# Altium PCB PCB1.PcbDoc
Units mm, origin at the board's own origin, x right, y up, seen from the top; angles counter-clockwise.
Board outline 115 x 90 mm, 2 copper layers (Top Layer, Bottom Layer); 70 components, 69 nets, 245 pads, 43 vias.
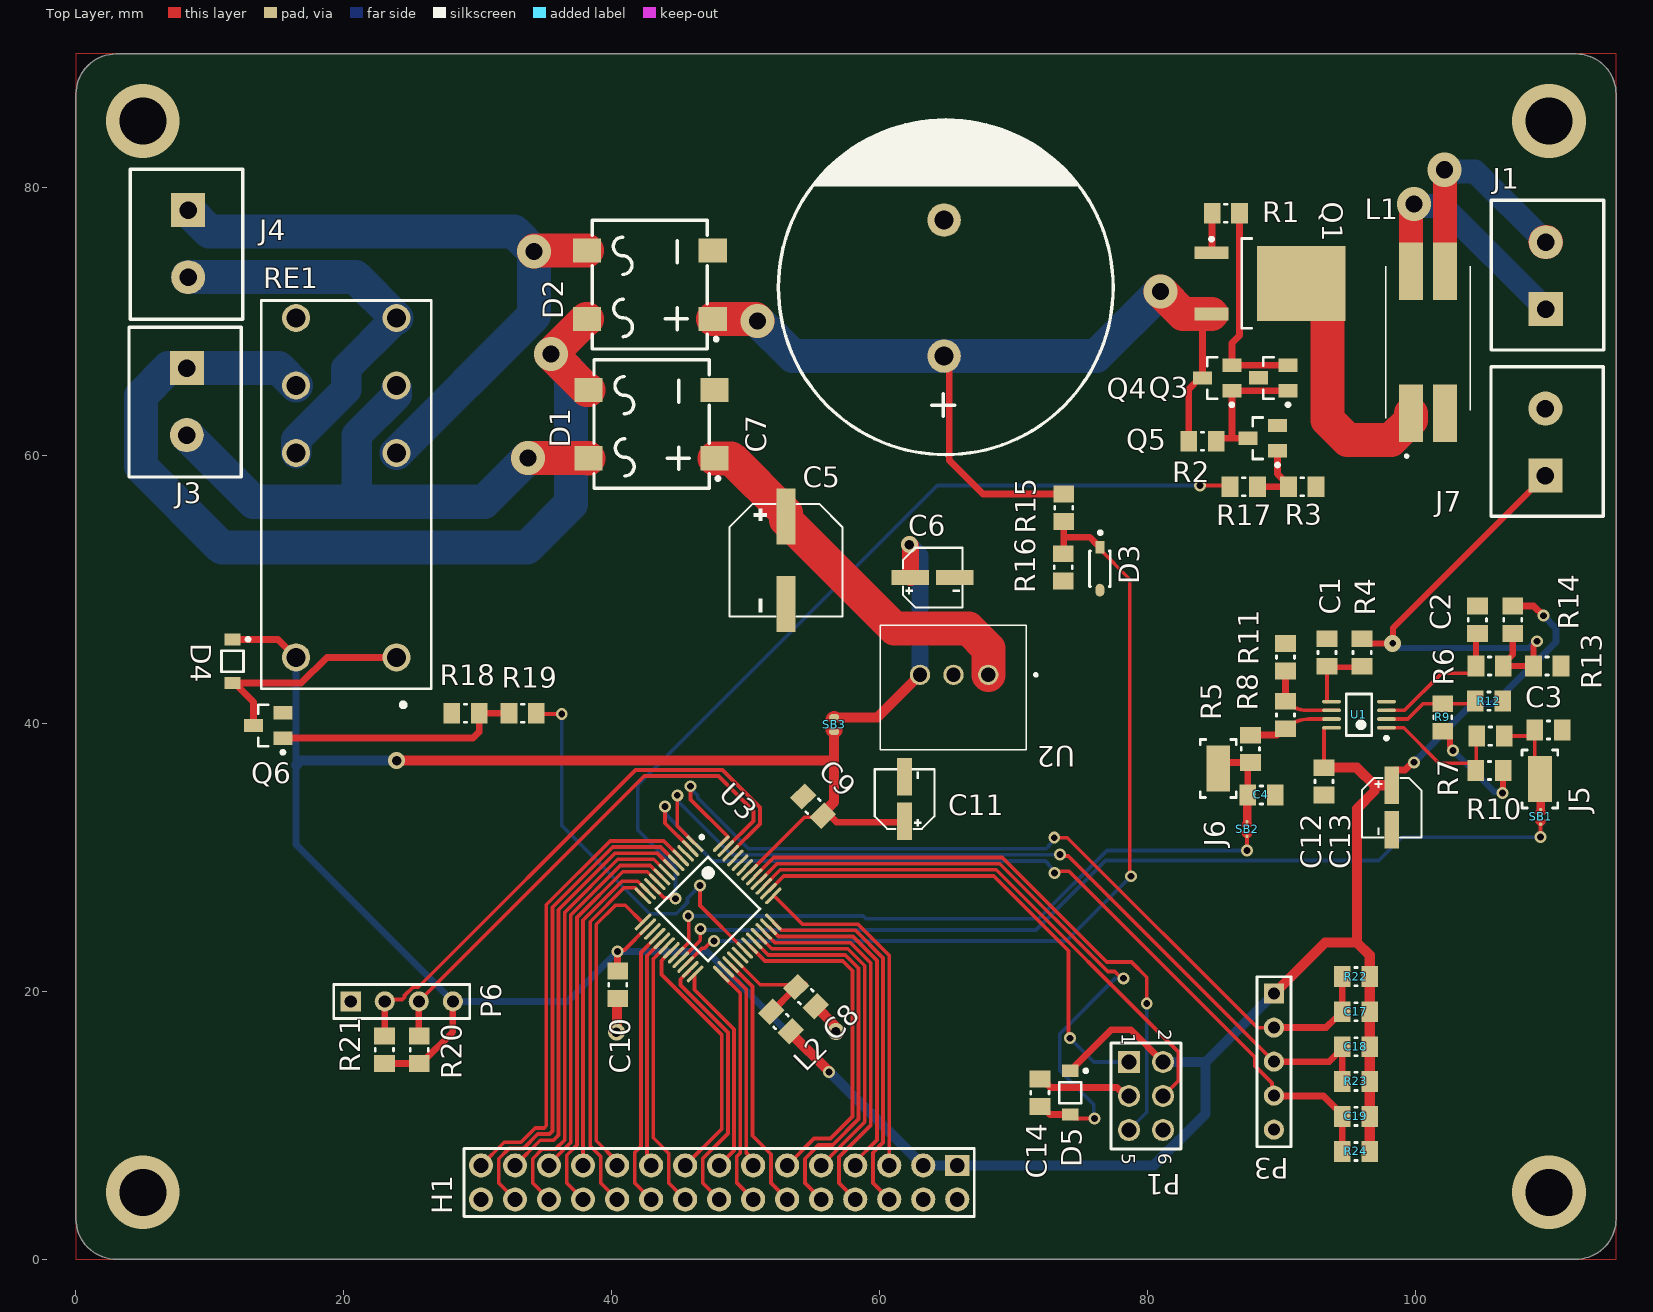
[diagram p0: Top Layer view]
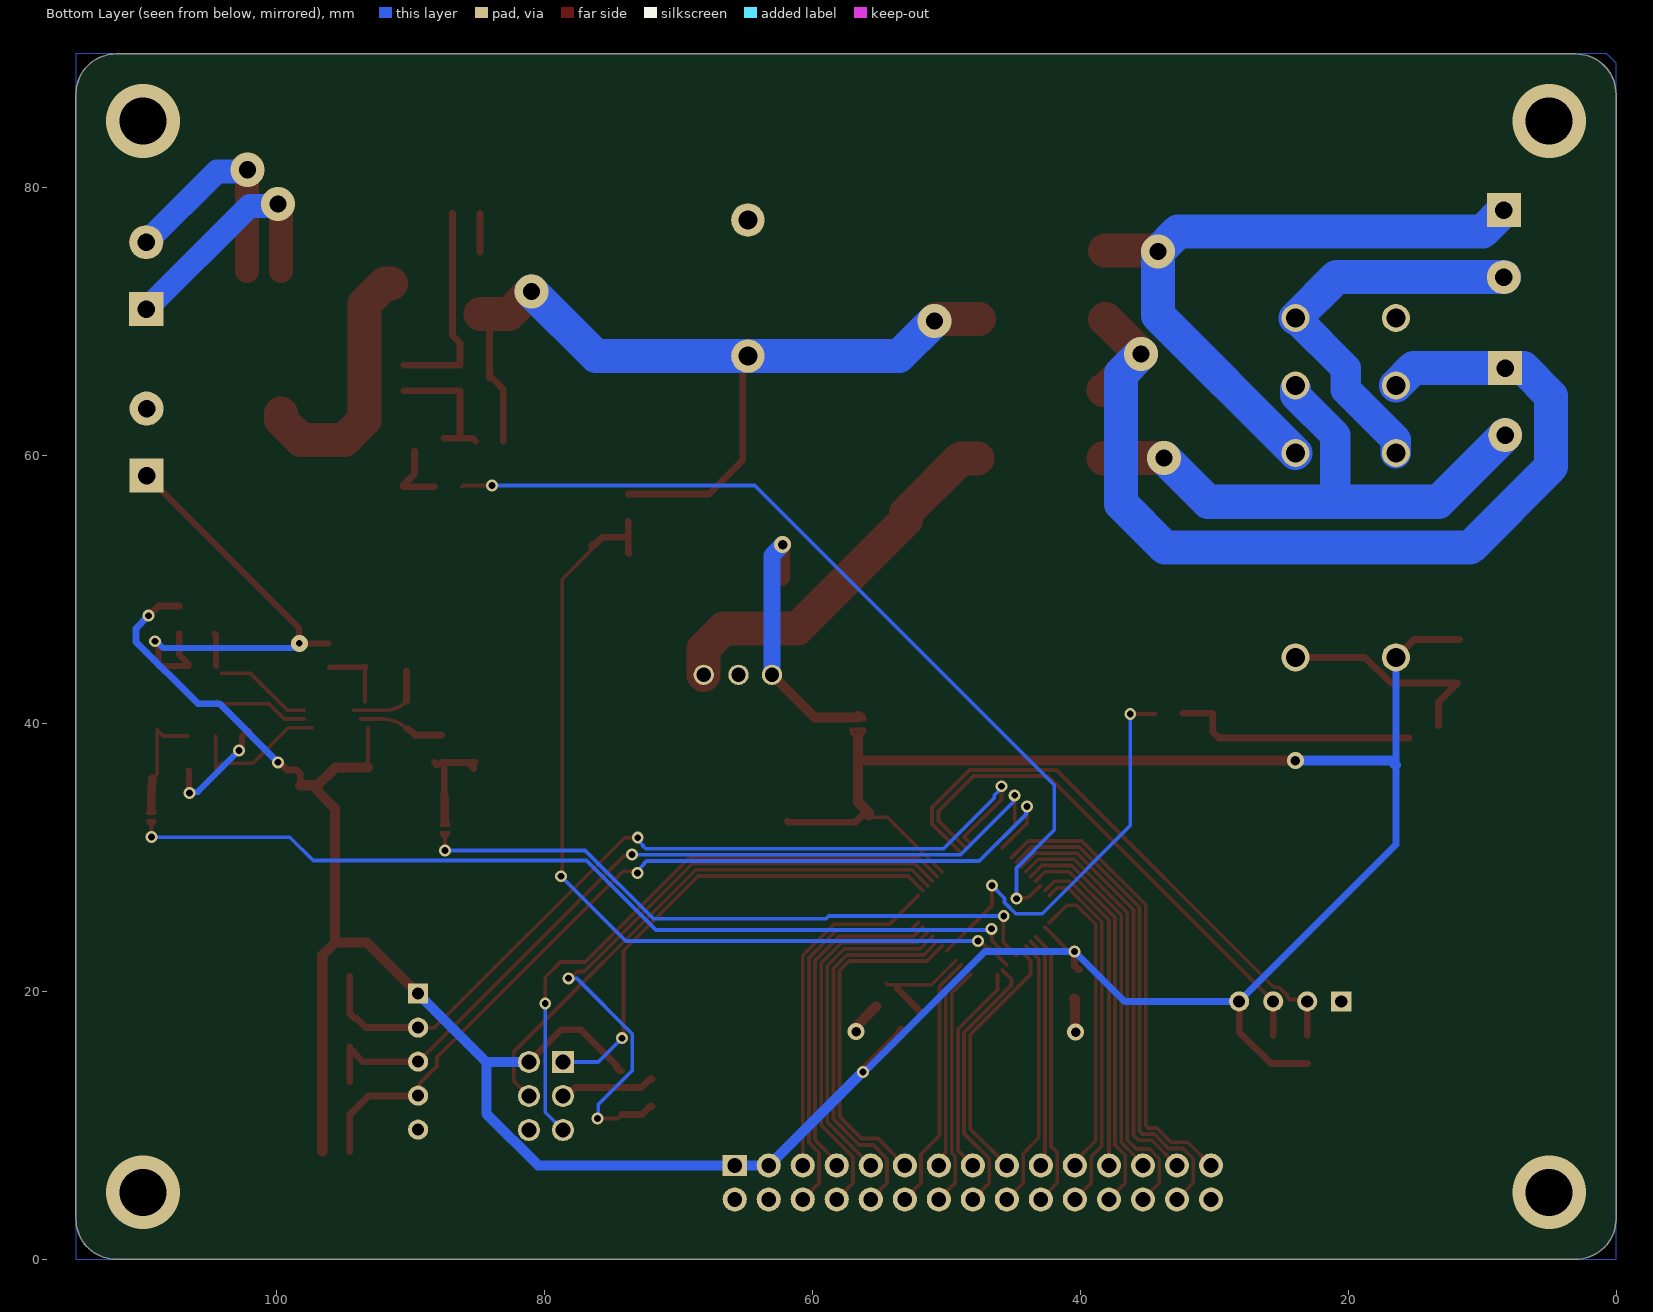
[diagram p1: Bottom Layer view, seen from below]

## Layer stack, top to bottom
Top Solder: solder mask 0.0102, Solder Resist, Dk 3.5
Top Layer: signal copper 0.0356
Dielectric 1: dielectric 0.32, FR-4, Dk 4.8
Bottom Layer: signal copper 0.0356
Bottom Solder: solder mask 0.0102, Solder Resist, Dk 3.5

## Board outline
0.006,3.006 0.006,87.006 cw(c3.006,87.006) 3.006,90.006 112.006,90.006 cw(c112.006,87.006) 115.006,87.006 115.006,3.006 cw(c112.006,3.006) 112.006,0.006 3.006,0.006 cw(c3.006,3.006)

## Design rules (kind name [scope] priority, off if disabled: settings)
AssemblyTestpoint [All] p1: testpointundercomponent=TRUE minsize=1.016 maxsize=4 preferedsize=1.524 minholesize=0 maxholesize=1.016 preferedholesize=0.813 testpointgrid=0.025 usegrid=TRUE gridtolerance=0 allowsidetop=TRUE allowsidebottom=TRUE
Clearance [All] p1: gap=0.178 ignorepadtopadclearanceinfootprint=FALSE
FabricationTestpoint [All] p1: side=3 testpointundercomponent=TRUE minsize=1.016 maxsize=4 preferedsize=1.524 minholesize=0 maxholesize=1.016 preferedholesize=0.813 testpointgrid=0.025 allowsidetop=TRUE allowsidebottom=TRUE usegrid=TRUE gridtolerance=0
MinimumSolderMaskSliver [All] p1: minsoldermaskwidth=0.2
PolygonConnect [All] p1: connectstyle=Relief reliefconductorwidth=0.254 reliefentries=4 polygonreliefangle="90 Angle" airgapwidth=0.254
RoomDefinition Voeding [InComponentClass('Voeding')] p1: confinementstyle=ConfineIn formatcopy=TRUE lockcomponents=FALSE outline 0.006,31.626 83.039,31.626 83.039,89.132 0.006,89.132
RoomDefinition Microcontroller [InComponentClass('Microcontroller')] p2: confinementstyle=ConfineIn formatcopy=TRUE lockcomponents=FALSE outline 16.967,2.388 102.768,2.388 102.768,40.589 16.967,40.589
RoomDefinition Thermokoppel [InComponentClass('Thermokoppel')] p3: confinementstyle=ConfineIn formatcopy=TRUE lockcomponents=FALSE outline 114.376,29.312 114.376,51.384 83.439,51.384 83.439,29.312
RoomDefinition Output [InComponentClass('Output')] p4: confinementstyle=ConfineIn formatcopy=TRUE lockcomponents=FALSE outline 79.375,54.175 117.729,54.175 117.729,82.702 79.375,82.702
RoutingVias [All] p1: holewidth=0.711 width=1.27 viastyle="Through Hole" minholewidth=0.3 minwidth=0.5 maxholewidth=5 maxwidth=6
SilkToSilkClearance [All] p1: silktosilkclearance=0
SilkToSolderMaskClearance [IsPad] p1: minsilkscreentomaskgap=0.15 clearancetoexposedcopper=TRUE
SolderMaskExpansion [All] p1: expansion=0.05 istentingtop=FALSE
Width [All] p1: maxlimit=5.08 minlimit=0.254 preferedwidth=0.279 minimp=50.000000 maximp=50.000000 favimp=50.000000
25 further rules are at their usual default settings.

## Classes and differential pairs
component class Voeding: C5 C6 C7 D1 D2 D3 D4 J3 J4 Q6 R15 R16 R18 R19 RE1 SB3 U2
component class Thermokoppel: C1 C2 C3 C4 C12 C13 J5 J6 R4 R5 R6 R7 R8 R9 R10 R11 R12 R13 R14 SB1 SB2 U1
component class Output: J1 J7 L1 Q1 Q3 Q4 Q5 R1 R2 R3 R17
component class Microcontroller: C8 C9 C10 C11 C14 C17 C18 C19 D5 H1 L2 P1 P3 P6 R20 R21 R22 R23 R24 U3

## Components (designator, comment, footprint, x,y, rotation, side; value= is the part's Value field where it differs from the comment)
C1 "10nF" RESC2013X50X30ML20T20 93.421,45.314 r90 top
C2 "10nF" RESC2013X50X30ML20T20 104.648,47.752 r90 top
C3 "10nF" RESC2013X50X30ML20T20 109.957,39.522 r0 top
C4 "10nF" RESC2013X50X30ML20T20 88.523,34.669 r0 top
C5 "100µF" CAP-SMD_BD8.0-L8.3-W8.3-FD 53.016,52.2 r270 top
C6 "10µF" CAP-SMD_BD4.0-L4.3-W4.3-FD-LS5.3 63.969,50.905 r0 top
C7 "4700µF" CAP-TH_BD25.0-P10.00-D1.4-FD 64.827,72.52 r90 top
C8 "100nF" RESC2013X50X30ML20T20 54.508,19.609 r135 top
C9 "100nF" RESC2013X50X30ML20T20 55.042,33.833 r135 top
C10 "100nF" RESC2013X50X30ML20T20 40.462,20.498 r270 top
C11 "10µF" CAP-SMD_BD4.0-L4.3-W4.3-FD-LS5.3 61.874,34.357 r90 top
C12 "100nF" RESC2013X50X30ML20T20 93.193,35.687 r270 top
C13 "10µF" CAP-SMD_BD4.0-L4.3-W4.3-FD-LS5.3 98.247,33.731 r270 top
C14 "100nF" RESC2013X50X30ML20T20 71.984,12.437 r90 top
C17 "10n" RESC2013X50X30ML20T20 95.58,18.491 r180 top
C18 "10n" RESC2013X50X30ML20T20 95.58,15.875 r180 top
C19 "10n" RESC2013X50X30ML20T20 95.58,10.668 r180 top
D1 "Bridge Rectifiers" TTF 42.983,62.36 r90 top
D2 "Bridge Rectifiers" TTF 42.856,72.774 r90 top
D3 "5v1" FP-SOD123-IPC_C 76.46,51.565 r270 top
D4 "1N4007" SOD-123FL 11.69,44.656 r270 top value=15pF
D5 "1n4148" SOD-123FL 74.244,12.437 r270 top value=15pF
H1 "2*15P 2.54mm" HDR-TH_30P-P2.54-V-M-R2-C15-S2.54 48.031,5.74 r180 top
J1 "Header 2H" Connector_2x1_p_5mm 109.753,70.946 r90 top
J3 "Header 2H" Connector_2x1_p_5mm 8.28,66.544 r270 top
J4 "Header 2H" Connector_2x1_p_5mm 8.382,78.334 r270 top
J5 "5015" 5015 109.322,35.865 r90 top
J6 "5015" 5015 85.293,36.652 r90 top
J7 "Header 2H" Connector_2x1_p_5mm 109.728,58.522 r90 top
L1 "Common mode Choke" 2545 100.965,68.475 r0 top
L2 "Choke" RESC2013X50X30ML20T20 52.654,17.755 r135 top
P1 "61300621121" 61300621121 79.908,12.192 r270 top
P3 "Header 5" HDR1X5 89.459,19.837 r270 top
P6 "Header 4" HDR1X4 20.523,19.253 r0 top
Q1 "P-Channel MOSFET" INF-PG-TO252-3-313_N 89.145,72.869 r0 top
Q3 "BC857" FAIR-SOT23-3_V 89.408,65.811 r180 top
Q4 "BC847" FAIR-SOT23-3_V 85.217,65.808 r180 top
Q5 "BC847" FAIR-SOT23-3_V 88.621,61.312 r180 top
Q6 "BC847" FAIR-SOT23-3_V 14.357,39.856 r180 top
R1 "100E" RESC2013X50X30ML20T20 85.868,78.101 r180 top
R2 "4K7" RESC2013X50X30ML20T20 84.125,61.083 r180 top
R3 "4K7" RESC2013X50X30ML20T20 91.567,57.68 r180 top
R4 "5K6" RESC2013X50X30ML20T20 96.037,45.314 r90 top
R5 "5K6" RESC2013X50X30ML20T20 87.702,38.114 r90 top
R6 "5K6" RESC2013X50X30ML20T20 105.562,44.298 r0 top
R7 "5K6" RESC2013X50X30ML20T20 105.622,39.065 r180 top
R8 "18K" RESC2013X50X30ML20T20 90.318,40.638 r90 top
R9 "18K" RESC2013X50X30ML20T20 102.057,40.462 r90 top
R10 "18K" RESC2013X50X30ML20T20 105.559,36.5 r0 top
R11 "100E" RESC2013X50X30ML20T20 90.318,44.956 r270 top
R12 "100E" RESC2013X50X30ML20T20 105.512,41.681 r180 top
R13 "10M" RESC2013X50X30ML20T20 109.864,44.298 r180 top
R14 "1M" RESC2013X50X30ML20T20 107.29,47.752 r90 top
R15 "68K" RESC2013X50X30ML20T20 73.768,56.112 r90 top
R16 "Resistor" RESC2013X50X30ML20T20 73.717,51.667 r90 top
R17 "10K" RESC2013X50X30ML20T20 87.198,57.68 r0 top
R18 "4K7" RESC2013X50X30ML20T20 29.089,40.77 r0 top
R19 "10K" RESC2013X50X30ML20T20 33.357,40.77 r180 top
R20 "4K7" RESC2013X50X30ML20T20 25.629,15.646 r270 top
R21 "4K7" RESC2013X50X30ML20T20 23.038,15.646 r270 top
R22 "10K" RESC2013X50X30ML20T20 95.58,21.107 r0 top
R23 "10K" RESC2013X50X30ML20T20 95.58,13.284 r0 top
R24 "10K" RESC2013X50X30ML20T20 95.58,8.052 r0 top
RE1 "RELAY_GENERAL_PURPOSE" RT42 20.19,44.945 r90 top
SB1 "SolderBridge" SolderBridge 109.372,33.071 r270 top
SB2 "SolderBridge" SolderBridge 87.447,32.164 r270 top
SB3 "SolderBridge" SolderBridge_BIG 56.591,39.929 r270 top
U1 "Dual-opamp" MSOP_8_S 95.809,40.665 r180 top
U2 "OKI-78SR-5/1.5-W36-C" OKI78SR515W36C 68.129,43.64 r180 top
U3 "ATMEGA4809-AU" FP-C04-300-PT-IPC_B 47.206,26.163 r315 top

## Footprints (in the part's own frame and the unit in brackets; to place one, negate y for a bottom-side part, rotate by r counter-clockwise, add the part's x,y. Pads: shape width x height; smd on the part's side, far side on the other; paste and mask are expansions set on the pad)
2545 [mm]
  rect 1.78x4.27 smd: 1(-1.27,-5.305) 2(1.27,-5.305) 3(1.27,5.305) 4(-1.27,5.305)
  silkscreen extent -3.15,-8.6 3.15,5.69, body extent -3.15,-7.26 3.15,7.26, height 9.6
5015 [mm]
  rect 3.43x1.78 smd paste+0 mask+0: 1(0,0)
  silkscreen extent -2.16,-1.34 2.17,1.34, body extent -1.44,-0.48 1.23,0.54, height 1.52
61300621121 [mm] "Pin Header, pitch 2.54 mm, THT, Vertical, dual row, 6p"
  rect 1.65x1.65 hole 1.1: 1(-2.54,-1.27)
  round 1.65 hole 1.1: 2(-2.54,1.27) 3(0,-1.27) 4(0,1.27) 5(2.54,-1.27) 6(2.54,1.27)
  silkscreen extent -3.96,-2.62 3.96,2.61, body extent -3.81,-2.54 3.81,2.54, height 8.59
CAP-SMD_BD4.0-L4.3-W4.3-FD-LS5.3 [mm]
  rect 2.8x1.1 smd: 1(-1.66,0) 2(1.66,0)
  silkscreen extent -2.22,-2.23 2.24,2.23, body extent -2.44,-2.16 2.46,2.14, height 5.41
CAP-SMD_BD8.0-L8.3-W8.3-FD [mm] "C445063"
  rect 4.2x1.4 smd: 1(-3.267,0) 2(3.267,0)
  silkscreen extent -4.2,-4.23 4.2,4.23, body extent -4.64,-4.09 4.26,4.21, height 10.31
CAP-TH_BD25.0-P10.00-D1.4-FD [mm]
  round 2.5 hole 1.4: 1(-5.08,0) 2(5.08,0)
  silkscreen extent -12.44,-12.63 12.56,12.37, body extent -12.5,-12.68 12.5,12.32, height 25
Connector_2x1_p_5mm [mm]
  rect 2.54x2.54 hole 1.3: 1(0,0)
  round 2.54 hole 1.3: 2(5,0)
  silkscreen extent -3.05,-4.32 8.13,4.06
FAIR-SOT23-3_V [mm] "SOT23, 3-Leads, Body 3.12x1.5mm, Pitch 0.95mm"
  rect 1.4x1 smd: 1(-1.1,0.95) 2(-1.1,-0.95) 3(1.1,0)
  silkscreen extent -1.23,-1.55 0.75,2.12, body extent -1.35,-1.56 1.35,1.56, height 1.2
FP-C04-300-PT-IPC_B [mm]
  rect 1.655x0.252 smd paste+0 mask+0: 1(-4.125,2.75)
  rrect100% 1.655x0.252 smd paste+0 mask+0: 2(-4.125,2.25) 3(-4.125,1.75) 4(-4.125,1.25) 5(-4.125,0.75) 6(-4.125,0.25) 7(-4.125,-0.25) 8(-4.125,-0.75) 9(-4.125,-1.25) 10(-4.125,-1.75) 11(-4.125,-2.25) 12(-4.125,-2.75) 25(4.125,-2.75) 26(4.125,-2.25) 27(4.125,-1.75) 28(4.125,-1.25) 29(4.125,-0.75) 30(4.125,-0.25) 31(4.125,0.25) 32(4.125,0.75) 33(4.125,1.25) 34(4.125,1.75) 35(4.125,2.25) 36(4.125,2.75)
  rrect100% 0.252x1.655 smd paste+0 mask+0: 13(-2.75,-4.125) 14(-2.25,-4.125) 15(-1.75,-4.125) 16(-1.25,-4.125) 17(-0.75,-4.125) 18(-0.25,-4.125) 19(0.25,-4.125) 20(0.75,-4.125) 21(1.25,-4.125) 22(1.75,-4.125) 23(2.25,-4.125) 24(2.75,-4.125) 37(2.75,4.125) 38(2.25,4.125) 39(1.75,4.125) 40(1.25,4.125) 41(0.75,4.125) 42(0.25,4.125) 43(-0.25,4.125) 44(-0.75,4.125) 45(-1.25,4.125) 46(-1.75,4.125) 47(-2.25,4.125) 48(-2.75,4.125)
  silkscreen extent -4.25,-2.75 2.75,3.58, body extent -5.2,-5.2 5.2,5.2, height 0.25
FP-SOD123-IPC_C [mm]
  rect 0.957x0.662 smd paste+0 mask+0: 1(-1.6,0)
  rrect100% 0.957x0.662 smd paste+0 mask+0: 2(1.6,0)
  silkscreen extent -2.82,-0.78 1.32,0.78, body extent -2.18,-0.87 2.18,0.87, height 0.25
HDR1X4 [mm] "Connector; Header; 4 Position"
  rect 1.5x1.5 hole 0.9: 1(0,0)
  round 1.5 hole 0.9: 2(2.54,0) 3(5.08,0) 4(7.62,0)
  silkscreen extent -1.27,-1.27 8.89,1.27
HDR1X5 [mm] "Connector; Header; 5 Position"
  rect 1.5x1.5 hole 0.9: 1(0,0)
  round 1.5 hole 0.9: 2(2.54,0) 3(5.08,0) 4(7.62,0) 5(10.16,0)
  silkscreen extent -1.27,-1.27 11.43,1.27
HDR-TH_30P-P2.54-V-M-R2-C15-S2.54 [mm]
  rect 1.8x1.575 hole 1.1: 1(-17.78,-1.27)
  round 1.8 hole 1.1: 2(-17.78,1.27) 3(-15.24,-1.27) 4(-15.24,1.27) 5(-12.7,-1.27) 6(-12.7,1.27) 7(-10.16,-1.27) 8(-10.16,1.27) 9(-7.62,-1.27) 10(-7.62,1.27) 11(-5.08,-1.27) 12(-5.08,1.27) 13(-2.54,-1.27) 14(-2.54,1.27) 15(0,-1.27) 16(0,1.27) 17(2.54,-1.27) 18(2.54,1.27) 19(5.08,-1.27) 20(5.08,1.27) 21(7.62,-1.27) 22(7.62,1.27) 23(10.16,-1.27) 24(10.16,1.27) 25(12.7,-1.27) 26(12.7,1.27) 27(15.24,-1.27) 28(15.24,1.27) 29(17.78,-1.27) 30(17.78,1.27)
  silkscreen extent -19.05,-2.54 19.05,2.54, body extent -19.08,-2.47 19.03,2.53, height 10.54
INF-PG-TO252-3-313_N [mm] "DPAK, 3-Leads, Body 6.5x6.12mm, Pitch 2.28mm, IPC Medium Density"
  rect 2.55x0.95 smd: 1(-4.35,2.28) 3(-4.35,-2.28)
  rect 6.6x5.6 smd: 2(2.35,0)
  silkscreen extent -4.47,-3.35 -1.35,3.43, body extent -5.04,-3.32 4.63,3.22, height 2.29
MSOP_8_S [mm] "TSOP, 8-Leads, Body 3x3mm, Pitch 0.65mm, IPC High Density"
  oval 1.4x0.28 smd: 1(-2.05,0.975) 2(-2.05,0.325) 3(-2.05,-0.325) 4(-2.05,-0.975) 5(2.05,-0.975) 6(2.05,-0.325) 7(2.05,0.325) 8(2.05,0.975)
  silkscreen extent -2.17,-1.55 0.95,1.87, body extent -1.55,-1.55 1.55,1.55, height 1.1
OKI78SR515W36C [mm]
  round 1.519 hole 1.08: 1(0,0) 2(2.6,0) 3(5.1,0)
  silkscreen extent -3.6,-3.7 8.05,5.6, body extent -2.85,-3.7 8.05,5.6, height 16.6
RESC2013X50X30ML20T20 [mm] "Chip Resistor, 2-Leads, Body 2.00x1.25mm, IPC Low Density"
  rect 1.25x1.55 smd: 1(-1.025,0) 2(1.025,0)
  silkscreen extent -0.1,-0.67 0.1,0.67, body extent -1.1,-0.72 1.1,0.72, height 0.5
RT42 [mm]
  round 2.1 hole 1.4: 11(20.3,3.75) 12(15.26,3.75) 14(25.34,3.75) 21(20.3,-3.75) 22(15.26,-3.75) 24(25.34,-3.75) A1(0,3.75) A2(0,-3.75)
  silkscreen extent -3.67,-6.35 26.65,6.35, body extent -2.21,-6.35 26.79,6.35, height 15.86
SOD-123FL [mm] "SOD, 2-Leads, Body 2.7x1.65mm"
  rect 0.91x1.22 smd: 1(-1.635,0) 2(1.635,0)
  silkscreen extent -1.76,-0.82 0.78,1.29, body extent -1.35,-0.82 1.35,0.82, height 1
SolderBridge [mil]
  round 10 smd mask+0: 1(23,0) 2(-20,0)
  Top Layer lines w11: 13,-10 ccw(c13,0) 23,0 ccw(c13,0) 13,10 13,0 13,-10 ; -10,-10 cw(c-10,0) -20,0 cw(c-10,0) -10,10 -10,0 -10,-10
SolderBridge_BIG [mil]
  oval 20x30 smd: 1(-21,1) 2(21,1)
  Top Layer lines w11: 14,-19 ccw(c14,1) 21,-17.73 ccw(c14,1) 34,1 ccw(c14,1) 14,21 14,1 14,-19 ; -14,-19 cw(c-14,1) -21,19.73 cw(c-14,1) -14,21 -14,1 -14,-19
TTF [mm] "C712546"
  rect 1.8x2.1 smd: 1(-2.55,-4.7) 2(2.55,-4.7) 3(2.55,4.7) 4(-2.55,4.7)
  silkscreen extent -4.8,-5.08 4.8,4.3, body extent -4.79,-5.11 4.95,5.08, height 1.73

## Part data
C1 C2 C3 C4 C8 C9 C10 C12 C14 C17 C18 C19: library part Capacitor, Capacitance=10uF, Case Code (Imperial)=0603, Case Code (Metric)=1608, Dielectric=X5R, Max Operating Temperature=85°C, Min Operating Temperature=-55°C, Package Quantity=4000, Tolerance=20%, Voltage=6.3V, Case/Package=0603, Depth=0.8mm, Height=0.8mm, Lead Free="Lead Free", Length=1.6mm, Material=Ceramic, Mount="Surface Mount", Packaging="Tape and Reel", Radiation Hardening=No, REACH SVHC="No SVHC", Termination=SMD/SMT, Thickness=0.035inch, Voltage Rating=6.3V, Voltage Rating (DC)=6.3V, Width=0.031inch
C5 C6 C7 C11 C13: library part "Electrolytic capacitor", Manufacturer=Panasonic, Max Operating Temperature="105 degC", Min Operating Temperature="-55 degC", Package Quantity=500, Voltage Rating="25 V", ComponentLink1Description="Manufacturer URL", ComponentLink1URL=http://www.panasonic.com/, ComponentLink2Description=Datasheet, ComponentLink2URL=http://industrial.panasonic.com/cdbs/www-data/pdf/RDE0000/ABA0000C1181.pdf, DatasheetVersion=03/2016, Height="10.2 mm", Lead Pitch="3.1 mm", Length="10.2 mm", Mount="Surface Mount", Mounting Technology="Surface Mount", PackageDescription="2-Pin Electrolytic Aluminum Capacitor, Body 8.3 x 8.3 mm", PackageReference=EEE-FK1E221P, Packaging="Tape and Reel", Pins=2, REACH SVHC="No SVHC", RoHSCompliant=true
D1 D2: Forward Current=35A, Manufacturer="Taiwan Semiconductor", Manufacturer Part Number="GBPC3510W T0", Max Junction Temp=+150°C, Max Repetitive Reverse Voltage=1000V, Max Surge Forward Current=400A, Package=GBPC-W, Peak Reverse Current=5uA, Temperature="-55°C to +150°C", Temperature Range Low=-55°C, Automotive=No, Category=Diode, ComponentLink2Description=Datasheet, ComponentLink2URL=https://www.taiwansemi.com/products/datasheet/GBPC%2015005%20SERIES_K14.pdf, Device Class L1="Discrete Semiconductors", Device Class L2=Diodes, Device Class L3="Rectifier Diodes", Height=11.23mm, Lead Free=Yes, Octopart=https://octopart.com/gbpc3510w+t0-taiwan+semiconductor-12450781, Reverse Voltage=1000V, RoHS=TRUE, Temperature Range High=+150°C
D3: library part Zener, Manufacturer="On Semiconductor", PartNumber=1SMB5928BT3G, ComponentLink1Description="Manufacturer URL", ComponentLink1URL=http://www.onsemi.com/, ComponentLink2Description=Datasheet, ComponentLink2URL=http://www.onsemi.com/pub_link/Collateral/1SMB5913BT3-D.PDF, ComponentLink3Description="Package Specification", ComponentLink3URL=http://www.onsemi.com/pub_link/Collateral/1SMB5913BT3-D.PDF, DatasheetVersion="Rev. 8", Mounting Technology="Surface Mount", PackageDescription="2-Pin Small Molded Package, J-Bend Lead, Body 4.33 x 3.625 mm", PackageReference=SMB-2-403A-03_H, PackageVersion="Rev. H, 05/2011", Packing="Tape and Reel", RoHS=Pb-Free, VZ Typ (V)=13
D4: library part Diode, Capacitance=15pF, Forward Current=1A, Manufacturer=Vishay, Manufacturer Part Number=1N4007-E3/54, Max Junction Temp=+150°C, Max Repetitive Reverse Voltage=1000V, Max Surge Forward Current=30A, Peak Reverse Current=30uA, Temperature="-50°C to +150°C", Temperature Range Low=-50°C, Automotive=No, Category=Diode, ComponentLink2Description=Datasheet, ComponentLink2URL=http://www.vishay.com/docs/88503/1n4001.pdf, Device Class L1="Discrete Semiconductors", Device Class L2=Diodes, Device Class L3="Rectifier Diodes", Digikey Description="DIODE GEN PURP 1KV 1A DO204AL", Height=2.7mm, Ipc Land Pattern Name=DIOPA1088W105L520D270, Lead Free=Yes, Mouser Description="Rectifiers Vr/1000V Io/1A", Octopart=https://octopart.com/1n4007-e3%2F54-vishay-39548207, Package=1N4007, RoHS=TRUE, Temperature Range High=+150°C
D5: library part Diode, Capacitance=15pF, Forward Current=1A, Manufacturer=Vishay, Manufacturer Part Number=1N4007-E3/54, Max Junction Temp=+150°C, Max Repetitive Reverse Voltage=1000V, Max Surge Forward Current=30A, Package=1N4007, Peak Reverse Current=30uA, Temperature="-50°C to +150°C", Temperature Range Low=-50°C, Automotive=No, Category=Diode, ComponentLink2Description=Datasheet, ComponentLink2URL=http://www.vishay.com/docs/88503/1n4001.pdf, Device Class L1="Discrete Semiconductors", Device Class L2=Diodes, Device Class L3="Rectifier Diodes", Digikey Description="DIODE GEN PURP 1KV 1A DO204AL", Height=2.7mm, Ipc Land Pattern Name=DIOPA1088W105L520D270, Lead Free=Yes, Mouser Description="Rectifiers Vr/1000V Io/1A", Octopart=https://octopart.com/1n4007-e3%2F54-vishay-39548207, RoHS=TRUE, Temperature Range High=+150°C
H1: BOM_JLCPCB Part Class="Extended Part", BOM_Manufacturer=Ckmtw(灿科盟), BOM_Manufacturer Part=B-2100S30P-B110, BOM_Supplier=LCSC, BOM_Supplier Part=C169817, Contributor=LCSC, spicePre=H, spiceSymbolName="2*15P 2.54mm"
J1 J3 J4 J7: "Header, 2-Pin, Right Angle", LatestRevisionDate=17-Jul-2002, LatestRevisionNote="Re-released for DXP Platform.", Publisher="Altium Limited"
J5 J6: library part Testpoint, "PC TEST POINT MINIATURE", Manufacturer=keystone, Automotive=No, Category=Conn, ComponentLink2Description=Datasheet, ComponentLink2URL=http://www.keyelco.com/product-pdf.cfm?p=1353, Conn Orientation=Straight, Contact Material=Silver, Device Class L1=Connectors, Device Class L2=unset, Device Class L3=unset, Digikey Description="PC TEST POINT MINIATURE", Height=1.65mm, Lead Free=Yes, Manufacturer Part Number=5015, Number Of Contacts=1, Octopart=https://octopart.com/5015-keystone-3822, Package=5015, RoHS=TRUE
L1: Case/Package=1808, Current=2A, Current Rating=2.3A, DC Resistance (DCR)=60mR, Insulation Resistance=10MR, Max Operating Temperature=85°C, Max Voltage Rating (DC)=50V, Min Operating Temperature=-40°C, Package Quantity=1, Test Frequency=100MHz, DC Current=2A, DC Resistance-Max=60mR, Depth=4.7mm, Element Configuration=Dual, Height=2mm, Impedance=900R, Lead Free="Lead Free", Length=0.185inch, Max Current Rating=2A, Max DC Current=2A, Mount="Surface Mount", Number of Lines=2, Number of Pins=4, Packaging="Tape and Reel", Radiation Hardening=No, REACH SVHC="No SVHC", RoHS Compliant=Yes, Series=ACM, Termination=Flat, Voltage Rating=50V, Voltage Rating (DC)=50V, Width=4.5mm
L2: Case/Package=1350, Current Rating=8.5A, DC Resistance (DCR)=14.1mR, Inductance=10uH, Inductance Tolerance=20%, Max Operating Temperature=155°C, Min Operating Temperature=-40°C, Package Quantity=1, Ratings=AEC-Q200, Resistor Type=Wirewound, Saturation Current=10A, Self Resonant Frequency=18MHz, Series Resistance=14.1R, Test Frequency=100kHz, Height=4.7mm, Height - Seated (Max)=0.197inch, Length=0.512inch, Max DC Current=8.5A, Mount="Surface Mount", Packaging="Tape and Reel", RMS Current (Irms)=8.5A, RoHS Compliant=Yes, Series=WE-HCI, Shielding=Shielded, Termination=SMD/SMT, Tolerance=20%, Width=12.8mm
P1: library part CMP-1502-01072-1, "THT Vertical Pin Header WR-PHD, Pitch 2.54 mm, Dual Row, 6 pins", Contact Resistance=20mOhm, Manufacturer="Wurth Elektronik", Operating Temperature=-40to105degC, Rated Current=3A, Withstanding Voltage=500VAC, Working Voltage=250VAC, Datasheet URL=https://katalog.we-online.de/em/datasheet/6130xx21121.pdf, Gender=Male, Manufacturer URL=http://www.we-online.de, Mounting Technology=THT, Orientation=Vertical, Package Reference=61300621121, Packaging=Bag, Part Number=61300621121, Pin Number=6, Pitch=2.54mm, Publisher=WurthElektronik, Row Number=Dual
P3: "Header, 5-Pin", LatestRevisionDate=17-Jul-2002, LatestRevisionNote="Re-released for DXP Platform.", Publisher="Altium Limited"
P6: "Header, 4-Pin", LatestRevisionDate=17-Jul-2002, LatestRevisionNote="Re-released for DXP Platform.", Publisher="Altium Limited"
Q1: Manufacturer="On Semiconductor", Package Type=D2PAK-3, PartNumber=NTB5605PT4G, Channel Polarity="P Channel", Ciss Typ (pF)=730, ComponentLink1Description="Manufacturer URL", ComponentLink1URL=http://www.onsemi.com/, ComponentLink2Description=Datasheet, ComponentLink2URL=http://www.onsemi.cn/pub_link/Collateral/NTB5605P-D.PDF, ComponentLink3Description="Package Specification", ComponentLink3URL=http://www.onsemi.com/pub_link/Collateral/418B-04.PDF, Configuration=Single, Coss Typ (pF)=211, Crss Typ (pF)=67, DatasheetVersion="Rev. 4", ID Max (A)=18.5, Mounting Technology="Surface Mount", PackageDescription="3-Pin Flange Mount, Body 9.145 x 9.97 mm, Pitch 2.54 mm", PackageReference=D2PAK-3-418B-04, PackageVersion="Rev. K, 09/2008", Packing="Tape and Reel", PD Max (W)=88, Qrr Typ (nC)=0.14, RoHS=Pb-Free, V(BR)DSS Min (V)=60, VGS Max (V)=20, VGS(th) Max (V)=2
Q3: library part "PNP transistor", Manufacturer="On Semiconductor", PartNumber=BC557BRL1G, ComponentLink1Description="Manufacturer URL", ComponentLink1URL=http://www.onsemi.com/, ComponentLink2Description=Datasheet, ComponentLink2URL=http://www.onsemi.com/pub_link/Collateral/BC556B-D.PDF, ComponentLink3Description="Package Specification", ComponentLink3URL=http://www.onsemi.com/pub_link/Collateral/MAC97-D.PDF, DatasheetVersion="Rev. 3", IC Continuous (A)=-0.1, Mounting Technology="Through Hole", PackageDescription="3-Pin Transistor Outline, Body 4.825 x 3.685 mm, Pitch 1.27 mm", PackageReference=TO-92-3-29-11_AM_BL, PackageVersion="Rev. AM", Packing="Tape and Reel", Polarity=PNP, RoHS=TRUE
Q4 Q5 Q6: library part "NPN Transistor", Manufacturer="On Semiconductor", PartNumber=BC547BRL1G, ComponentLink1Description="Manufacturer URL", ComponentLink1URL=http://www.onsemi.com/, ComponentLink2Description=Datasheet, ComponentLink2URL=http://www.onsemi.com/pub_link/Collateral/BC546-D.PDF, ComponentLink3Description="Package Specification", ComponentLink3URL=http://www.onsemi.com/pub_link/Collateral/MAC97-D.PDF, DatasheetVersion="Rev. 7", fT Min (MHz)=150, IC Continuous (A)=0.1, Mounting Technology="Through Hole", PackageDescription="3-Pin Transistor Outline, Body 4.825 x 3.685 mm, Pitch 1.27 mm", PackageReference=TO-92-3-29-11_AM_BL, PackageVersion="Rev. AM", Packing="Tape and Reel", Polarity=NPN, RoHS=TRUE
R1 R2 R3 R4 R5 R6 R7 R8 R9 R10 R11 R12 R13 R14 R15 R17 R18 R19 R20 R21 R22 R23 R24: library part Resistor, Manufacturer="Vishay Dale", Part Number=CRCW08050000Z0EA
R16: Manufacturer="Vishay Dale", Part Number=CRCW08050000Z0EA
RE1: Ambient Temperature Range High=+85°C, Ambient Temperature Range Low=-40°C, Coil Power=403mW, Coil Resistance=62Ω, Coil Voltage=5V, Current Rating=8A, Manufacturer="TE Connectivity", Manufacturer Part Number=RT424005, Automotive=No, Category=Relay, Coil Type=Non-Latching, ComponentLink2Description=Datasheet, ComponentLink2URL=https://www.te.com/commerce/DocumentDelivery/DDEController?Action=showdoc&DocId=Data+Sheet%7FRT2%7F1014%7Fpdf%7FEnglish%7FENG_DS_RT2_1014.pdf%7F5-1393243-9, Device Class L1=Electromechanical, Device Class L2=Relays, Device Class L3="Power Relays", Digikey Description="RELAY GENERAL PURPOSE DPDT 8A 5V", Height=15.7mm, Lead Free=Yes, Mouser Description="General Purpose Relay, Rt2 Series, Power, Non Latching, Dpdt, 5 Vdc, 8 A Rohs Compliant: Yes", Number Of Contacts=2, Octopart=https://octopart.com/5-1393243-9-te+connectivity-41835766, Package=RT424005, RoHS=TRUE, Throw Configuration=DPDT
U1: Case/Package=PDIP, Input Bias Current=1pA, Input Offset Voltage (Vos)=4.5mV, Max Operating Temperature=125°C, Max Supply Voltage=6V, Min Operating Temperature=-40°C, Min Supply Voltage=1.8V, Nominal Supply Current=100uA, Operating Supply Voltage=5.5V, Output Current=23mA, Package Quantity=60, Power Supply Rejection Ratio (PSRR)=86dB, Voltage Gain=112dB, Amplifier Type="GENERAL PURPOSE", Bandwidth=1MHz, Common Mode Rejection Ratio=60dB, Gain Bandwidth Product=1MHz, Height=3.3mm, Input Offset Voltage-Max=4.5mV, Lead Free="Lead Free", Length=9.27mm, Mount="Through Hole", Number of Amplifiers=2, Number of Channels=2, Number of Circuits=2, Number of Elements=2, Number of Pins=8, Operating Supply Current=100uA, Output Current per Channel=23mA, Packaging=Rail/Tube, Radiation Hardening=No, REACH SVHC="No SVHC", RoHS Compliant=Yes, Slew Rate=0.6V/µs, Slew Rate-Nom=0.6V/µs, Supply Current=100uA, Technology=CMOS, Unity Gain Bandwidth Product=1MHz, Width=6.35mm
U2: library part "DC/DC Converter", Current - Output (Max)=1.5A, Manufacturer=Murata, Operating Temperature=-40degC~85degC, Package / Case=3-SIPModule, Power (Watts) - Manufacture Series=8W, Voltage - Input (Max)=36V, Voltage - Input (Min)=7V, Voltage - Isolation=-, Voltage - Output 1=5V, Applications=ITE(Commercial), Category=PowerSupplies-BoardMount, Datasheet URL=https://datasheet.ciiva.com/8006/1790439-8006672.pdf, Datasheet Version=Oct-13, Efficiency=90.5%, Family=DCDCConverters, Features=SCP, Manufacturer URL=http://www.murata.com/, Mounting Type=ThroughHole, Number of Outputs=1, Packaging=Tube, Power (Watts) - Max=8W, Series=Okami™OKI-78SR, Size / Dimension="0.41\"Lx0.30\"Wx0.65\"H(10.4mmx7.6mmx16.5mm)", Type=LinearRegulatorReplacement, Voltage - Output 2=-, Voltage - Output 3=-
U3: library part MCU, "MCU 8-BIT", Case/Package=TQFP, Max Operating Temperature=85°C, Min Operating Temperature=-40°C, Core Architecture=AVR, Interface=I2C, Memory Size=48KB, Memory Type=FLASH, Mount="Surface Mount", Number of I/Os=41, Oscillator Type=Internal, Peripherals="Brown-out Detect/Reset", RoHS Compliant=Yes, Series="megaAVR® 0, Functional Safety (FuSa)"

## Via types
v1: diameter 0.889, hole 0.508, Top Layer to Bottom Layer, 27 vias
v2: diameter 2.54, hole 1.27, Top Layer to Bottom Layer, 7 vias
v3: diameter 1.27, hole 0.711, Top Layer to Bottom Layer, 4 vias
v4: diameter 5.5, hole 3.5, Top Layer to Bottom Layer, 4 vias
v5: diameter 1.27, hole 0.508, Top Layer to Bottom Layer, 1 vias

## Nets (pads, with @x,y where several pads share a name; then routed paths per layer and width w, separated by ;. In a path a pad name is that pad's centre, name@x,y a point inside that pad or via, vN(x,y) a via of type N, cw(c..) or ccw(c..) an arc to the next point about the centre after c; other vN are vias at no path point)
+5: C9.1 C10.1 C11.1 C12.1 C13.1 C17.1 C18.1 C19.1 D4.1 D5.1 H1.1 H1.3 L2.1 P1.2 P3.1 P6.4 R14.2 R20.2 R21.2 R22.2 R23.2 R24.2 RE1.A1 SB3.2 U1.8 U3.14 U3.42 | length 269.4
  Top Layer w0.279: v1(40.437,22.987) 40.553,23.104 40.965,23.104 U3.14@42.663,24.802 ; U3.42@50.336,28.939 54.399,33.002 55.661,33.002 C9.1 ; C12.1 U1.8@93.193,39.661
  Top Layer w0.508: D4.1 15.094,46.291 RE1.A1 ; R21.2 R20.2 25.779,14.621 28.143,16.986 P6.4 ; C10.1@40.053,21.629 40.172,21.629 40.437,21.894 v1(40.437,22.987) ; C9.1 55.787,33.128 56.311,33.128 56.8,32.639 61.817,32.639 C11.1 ; D5.1 74.399,14.072 74.6,14.273 74.6,14.428 77.317,17.145 78.765,17.145 P1.2 ; C13.1 98.247,36.242 98.543,36.538 99.249,36.538 99.821,37.109 v1(99.924,37.109) ; R14.2 108.855,48.777 v1(109.576,48.057)
  Top Layer w0.762: v3(23.952,37.236) 56.503,37.236 56.617,37.35 ; L2.1 53.379,16.886 56.236,14.03 v1(56.236,13.995) ; C9.1@55.787,33.128 55.787,33.333 56.617,34.163 56.617,37.35 ; 56.617,39.065 56.617,37.35 ; P3.1 93.269,23.647 95.656,23.647 ; C12.1 95.647,36.712 96.968,35.392 ; R24.2 C19.1 R23.2 C18.1 C17.1 96.605,22.699 95.656,23.647 ; C13.1 96.968,35.392 ; 95.656,23.647 95.656,33.655 96.968,34.966 96.968,35.392
  Bottom Layer w0.508: RE1.A1 16.44,36.903 16.44,30.956 P6.4 36.703,19.253 v1(40.437,22.987) 47.141,22.987 56.133,13.995 v1(56.236,13.995) ; v1(99.924,37.109) 104.3,41.486 105.9,41.486 110.515,46.101 110.515,47.117 v1(109.576,48.057)
  Bottom Layer w0.762: 16.44,36.903 16.773,37.236 v3(23.952,37.236) ; v1(56.236,13.995) 56.261,13.995 63.246,7.01 H1.3 H1.1 80.494,7.01 84.353,10.87 84.353,14.732 ; P1.2 84.353,14.732 ; P3.1 84.353,14.732
analog1: SB2.1 U3.20 | length 48.3
  Top Layer w0.279: U3.20@44.784,22.689 45.759,23.664 45.759,25.592 v1(45.725,25.625) ; v1(87.442,30.531) 87.447,30.536 SB2.1
  Bottom Layer w0.279: v1(45.725,25.625) 58.786,25.625 58.986,25.425 71.882,25.425 76.987,30.531 v1(87.442,30.531)
analog2: SB1.1 U3.21 | length 68.8
  Top Layer w0.279: U3.21@45.66,22.848 46.624,23.813 46.624,24.652 v1(46.649,24.677) ; v1(109.362,31.521) 109.362,32.476 SB1.1
  Bottom Layer w0.279: v1(46.649,24.677) 46.739,24.587 71.69,24.587 76.872,29.769 97.286,29.769 99.038,31.521 v1(109.362,31.521)
AVDD: C8.2 L2.2 U3.28 | length 8.5
  Top Layer w0.279: U3.28@49.275,22.327 51.095,20.507 54.389,20.507 C8.2@54.495,20.613
  Top Layer w0.508: L2.2 C8.2@53.678,20.228
GND: C1.2 C2.2 C3.2 C4.2 C5.2 C6.2 C7.2 C8.1 C9.2 C10.2 C11.2 C12.2 C13.2 D1.2 D2.2 D3.2 H1.2 H1.4 H1.30 J7.2 L1.2 P1.6 P3.5 P6.1 Q3.3 Q5.2 Q6.2 R3.1 R11.1 R12.1 R13.1 R16.1 R18.1 U1.4 U2.2 U3.15 U3.29 U3.43 | length 5.1
  Top Layer w0.762: v3(40.361,16.967) 40.411,17.018 40.411,19.422 C10.2 ; C8.1 56.646,17.471 56.646,17.09 v3(56.744,16.993)
  other v4: 5,5 110,5 5,85 110,85
NetC1_1: C1.1 R4.1 U1.5 | length 5.3
  Top Layer w0.279: U1.5@93.421,41.649 C1.1@93.421,44.212
  Top Layer w0.432: C1.1 93.421,44.212 R4.1@96.037,44.212
NetC2_1: C2.1 R6.1 U1.3 | length 9.8
  Top Layer w0.279: U1.3@97.959,40.99 97.962,40.994 99.205,40.994 101.962,43.751 R6.1@104.141,43.751
  Top Layer w0.457: R6.1 104.537,46.616 C2.1
NetC3_1: C3.1 J5.1 R7.1 SB1.2 | length 8.6
  Top Layer w0.279: R7.1 108.474,39.065 C3.1 108.932,36.255 J5.1
  Top Layer w0.635: J5.1 109.372,34.467 SB1.2
NetC4_1: C4.1 J6.1 R5.1 SB2.2 | length 7.6
  Top Layer w0.508: J6.1@85.194,37.09 R5.1 ; J6.1 J6.1@85.732,37.091 ; C4.1 R5.1@87.498,36.886 ; R5.1@88.036,36.888 R5.1@88.24,37.091
  Top Layer w0.635: SB2.2 87.447,34.212 C4.1
NetC5_1: C5.1 D1.1 U2.1 | length 28.3
  Top Layer w2.54: D1.1 48.933,59.81 53.016,55.727 C5.1 ; C5.1@53.016,55.207 61.132,47.092 66.641,47.092 68.129,45.604 U2.1
NetC6_1: C6.1 SB3.1 U2.3 | length 20.3
  Top Layer w0.762: SB3.1 57.092,40.462 59.851,40.462 U2.3
  Top Layer w1.27: v3(62.23,53.365) 62.308,53.287 C6.1
  Bottom Layer w1.27: v3(62.23,53.365) 63.029,52.566 U2.3
NetC14_2: C14.2 P1.3 | length 7.2
  Top Layer w0.508: C14.2 72.134,13.462 72.769,12.827 77.745,12.827 78.38,12.192 P1.3
NetD1_3: D1.3 D2.4 J3.1 RE1.11 | length 73.7
  Top Layer w2.54: D2.4 38.122,70.224 v2(35.49,67.592) 38.173,64.91 D1.3
  Bottom Layer w2.54: RE1.11 15.141,66.544 6.923,66.544 4.851,64.472 4.851,59.182 10.897,53.137 33.68,53.137 36.957,56.413 36.957,66.125 v2(35.49,67.592)
NetD1_4: D1.4 J3.2 RE1.21 | length 43.1
  Top Layer w2.54: v2(33.763,59.845) 38.248,59.845 D1.4
  Bottom Layer w2.286: 20.975,56.566 20.975,61.539 23.94,64.504 RE1.21@23.94,65.009
  Bottom Layer w2.54: J3.2 13.259,56.566 20.975,56.566 30.483,56.566 v2(33.763,59.845)
NetD2_3: D2.3 J4.1 RE1.22 | length 50.4
  Top Layer w2.54: v2(34.195,75.263) 34.256,75.324 D2.3
  Bottom Layer w2.54: J4.1 9.985,76.731 32.727,76.731 v2(34.195,75.263) 34.195,70.459 RE1.22
NetD4_2: D4.2 Q6.3 RE1.A2 | length 16.6
  Top Layer w0.508: Q6.3 13.257,41.609 11.845,43.021 16.816,43.021 18.74,44.945 RE1.A2
NetJ1_1: J1.1 L1.4 | length 18.7
  Top Layer w1.778: L1.4 99.696,73.781 99.696,78.381 99.899,78.585 v2(99.899,78.791) ; J1.1@109.385,70.578 J1.1
  Bottom Layer w1.778: v2(99.899,78.791) 100.045,78.645 102.054,78.645 J1.1
NetJ1_2: J1.2 L1.3 | length 17.4
  Top Layer w1.778: v2(102.21,81.356) 102.236,81.33 102.236,73.781 L1.3
  Bottom Layer w1.778: v2(102.21,81.356) 102.33,81.236 104.464,81.236 J1.2
NetJ4_2: J4.2 RE1.12 RE1.24 | length 30
  Bottom Layer w2.286: RE1.12 16.44,61.192 20.19,64.942 20.19,66.535 RE1.24
  Bottom Layer w2.54: J4.2 20.891,73.334 RE1.24
NetL1_1: L1.1 Q1.2 | length 19.2
  Top Layer w2.54: Q1.2 91.939,72.869 93.469,71.339 93.469,62.676 94.956,61.189 98.207,61.189 99.695,62.676 L1.1
NetQ1_1: Q1.1 R1.2 | length 3
  Top Layer w0.254: Q1.1 Q1.1@84.843,75.197
  Top Layer w0.508: Q1.1@84.843,75.197 R1.2
NetQ3_1: Q3.1 Q4.1 Q5.3 R2.1 | length 10.3
  Top Layer w0.508: R2.1 85.378,61.312 86.449,61.312 ; Q5.3 86.449,61.312 ; Q3.1@90.533,64.858 Q4.1 86.317,61.444 86.449,61.312
NetQ3_2: Q3.2 Q4.2 R1.1 | length 15.8
  Top Layer w0.508: R1.1 86.893,68.983 86.317,68.406 Q4.2 Q3.2@90.533,66.758
NetQ5_1: Q5.1 R3.2 R17.2 | length 5.3
  Top Layer w0.508: R17.2 R3.2 90.542,57.83 89.721,58.651 Q5.1
NetQ6_1: Q6.1 R18.2 R19.2 | length 18.5
  Top Layer w0.508: Q6.1 15.468,38.916 29.648,38.916 30.114,39.382 R18.2 R19.2
NetR5_2: R5.2 R8.1 U1.7 | length 6.4
  Top Layer w0.279: R8.1 cw(c92.074,37.857) 92.074,40.34 U1.7
  Top Layer w0.432: R8.1@90.168,39.613 R8.1
  Top Layer w0.508: R5.2 89.694,39.139 R8.1@90.168,39.613
NetR7_2: R7.2 R10.1 U1.1 | length 11.2
  Top Layer w0.279: U1.1@97.372,39.69 99.146,39.69 101.79,37.046 104.137,37.046 104.534,36.65 R10.1 104.565,36.532 104.565,39.033 R7.2
NetR8_2: R8.2 R11.2 U1.6 | length 6.4
  Top Layer w0.279: R8.2 ccw(c91.942,43.287) 91.942,40.99 U1.6@94.284,40.99
  Top Layer w0.508: R8.2 R11.2
NetR9_1: R9.1 R10.2 | length 8.1
  Top Layer w0.457: R9.1 102.207,39.437 102.604,39.041 v1@102.604,38.331 ; v1(106.528,34.823) 106.556,34.851 106.556,36.472 R10.2
  Bottom Layer w0.457: v1(102.819,37.998) 105.912,34.906 106.445,34.906 v1(106.528,34.823)
NetR9_2: R9.2 R12.2 U1.2 | length 7.1
  Top Layer w0.279: U1.2@97.959,40.34 97.962,40.344 99.453,40.344 100.596,41.487 104.292,41.487 R12.2
PA2: P6.2 R21.1 U3.46 | length 43.2
  Top Layer w0.279: P6.2 23.213,19.403 24.372,19.403 24.536,19.567 24.536,19.695 25.161,20.321 25.567,20.321 41.784,36.538 48.28,36.538 51.079,33.738 51.079,32.511 U3.46@48.922,30.353
  Top Layer w0.508: R21.1@23.063,16.697 P6.2
PA3: P6.3 R20.1 U3.47 | length 39.2
  Top Layer w0.279: P6.3 42.431,36.081 47.993,36.081 50.597,33.477 50.597,32.735 U3.47@48.568,30.707
  Top Layer w0.508: R20.1@25.603,16.697 P6.3
PA4: C17.2 P3.2 R22.1 U3.48 | length 66.2
  Top Layer w0.279: v1(45.898,35.319) 45.898,34.341 48.686,31.553 48.686,31.531 U3.48@48.214,31.06 ; v1(73.05,31.483) 74.029,31.483 88.214,17.297 P3.2
  Top Layer w0.508: P3.2 93.361,17.297 94.034,17.97 94.184,17.97 94.555,18.341 C17.2 R22.1
  Bottom Layer w0.279: v1(45.898,35.319) 45.898,35.173 46.436,34.635 46.436,34.438 50.216,30.658 72.456,30.658 72.654,30.855 72.654,30.921 73.05,31.318 v1(73.05,31.483) ; P3.2@89.281,17.475 P3.2
PA5: C18.2 P3.3 R23.1 U3.1 | length 65.4
  Top Layer w0.279: v1(44.907,34.646) 44.907,32.351 U3.1@46.199,31.06 ; v1(73.473,30.228) 73.589,30.112 74.105,30.112 P3.3
  Top Layer w0.508: P3.3 93.588,14.757 C18.2@94.555,15.725 ; R23.1 C18.2@94.555,15.725 ; C18.2 C18.2@94.555,15.725
  Bottom Layer w0.279: v1(44.907,34.646) 45.024,34.529 45.024,34.123 48.946,30.201 73.445,30.201 v1(73.473,30.228)
  Bottom Layer w0.508: P3.3@89.332,14.884 P3.3
PA6: C19.2 P3.4 R24.1 U3.2 | length 68.1
  Top Layer w0.279: v1(43.993,33.807) 43.993,32.559 U3.2@45.845,30.707 ; v1(73.07,28.855) 73.187,28.972 74.152,28.972 88.036,15.088 88.036,14.427 89.305,13.158 89.305,12.371 P3.4
  Top Layer w0.508: P3.4 89.472,12.204 93.169,12.204 94.555,10.818 C19.2 R24.1
  Bottom Layer w0.279: v1(43.993,33.807) 44.07,33.73 44.07,33.222 47.549,29.743 72.39,29.743 72.588,29.546 72.588,29.502 73.07,29.02 v1(73.07,28.855)
PB0: H1.29 U3.4 | length 35.1
  Top Layer w0.279: H1.29 31.979,8.738 33.225,8.738 34.298,9.81 34.965,9.81 35.128,9.974 35.128,26.474 39.896,31.242 43.895,31.242 U3.4@45.138,29.999
PB1: H1.28 U3.5 | length 36.7
  Top Layer w0.279: H1.28 31.574,5.688 31.574,7.515 32.34,8.28 33.415,8.28 34.487,9.353 35.357,9.353 35.585,9.582 35.585,26.285 40.086,30.785 43.645,30.785 U3.5@44.784,29.646
PB2: H1.27 U3.6 | length 31.6
  Top Layer w0.279: H1.27 34.677,8.896 35.67,8.896 35.834,9.059 35.834,9.062 36.043,9.271 36.043,26.095 40.275,30.328 43.395,30.328 U3.6@44.431,29.292
PB3: H1.26 U3.7 | length 33.1
  Top Layer w0.279: H1.26 34.114,5.688 34.114,7.515 34.827,8.228 35.812,8.228 36.5,8.915 36.5,25.906 40.464,29.87 43.146,29.87 U3.7@44.077,28.939
PB4: H1.25 U3.8 | length 28
  Top Layer w0.279: H1.25 35.331,7.098 36.957,8.724 36.957,25.716 40.654,29.413 42.887,29.413 43.715,28.585 U3.8@43.724,28.585
PB5: H1.24 U3.9 | length 29.5
  Top Layer w0.279: H1.24 36.654,5.688 36.654,7.774 37.414,8.534 37.414,25.513 40.834,28.933 42.66,28.933 43.351,28.242 U3.9@43.37,28.242
PC1: H1.23 U3.11 | length 24.6
  Top Layer w0.279: H1.23 37.871,25.324 40.773,28.226 41.953,28.226 42.654,27.525 U3.11@42.663,27.525
PC2: H1.22 U3.12 | length 26.8
  Top Layer w0.279: H1.22 39.194,5.688 39.194,7.673 38.405,8.462 38.405,25.208 40.948,27.752 41.729,27.752 U3.12@42.309,27.171
PC3: H1.21 U3.13 | length 23.2
  Top Layer w0.279: H1.21 40.411,7.301 38.862,8.851 38.862,25.019 40.284,26.441 41.023,26.441 U3.13@42.309,25.155
PC4: H1.20 U3.16 | length 20.8
  Top Layer w0.279: H1.20 41.734,5.688 41.734,7.977 42.189,8.433 42.189,22.914 U3.16@43.37,24.094
PC5: H1.19 U3.17 | length 17.3
  Top Layer w0.279: H1.19 42.951,7.422 42.647,7.727 42.647,22.664 U3.17@43.724,23.741
PC6: H1.18 U3.18 | length 20.3
  Top Layer w0.279: U3.18@44.077,23.387 43.104,22.414 43.104,9.071 44.274,7.901 44.274,5.688 H1.18
PC7: H1.17 U3.19 | length 19.3
  Top Layer w0.279: U3.19@44.431,23.034 43.844,22.447 43.844,22.409 43.833,22.399 43.73,22.296 43.73,21.257 48.235,16.752 48.235,9.754 H1.17
PD3: H1.16 U3.23 | length 20.2
  Top Layer w0.279: U3.23@45.845,21.62 45.845,21.611 45.144,20.91 45.144,20.489 48.692,16.941 48.692,9.398 46.814,7.52 46.814,5.688 H1.16
PD4: H1.15 U3.24 | length 15.9
  Top Layer w0.279: U3.24@46.199,21.266 46.199,20.121 49.149,17.17 49.149,8.128 H1.15
PD5: H1.14 U3.25 | length 18
  Top Layer w0.279: U3.25@48.214,21.266 49.606,19.874 49.606,7.939 49.354,7.686 49.354,5.688 H1.14
PD6: H1.13 U3.26 | length 15.4
  Top Layer w0.279: U3.26@48.568,21.62 50.063,20.124 50.063,7.93 50.571,7.422 H1.13
PD7: H1.12 U3.27 | length 19.2
  Top Layer w0.279: U3.27@48.922,21.973 50.521,20.374 50.521,9.22 51.894,7.847 51.894,5.688 H1.12
PE1: H1.11 U3.31 | length 25.7
  Top Layer w0.279: U3.31@50.336,23.387 51.451,22.272 57.258,22.272 57.988,21.541 57.988,10.654 56.351,9.017 55.118,9.017 H1.11
PE2: H1.10 U3.32 | length 28.6
  Top Layer w0.279: U3.32@50.689,23.741 51.701,22.729 57.447,22.729 58.445,21.731 58.445,10.465 56.515,8.534 55.454,8.534 54.434,7.515 54.434,5.688 H1.10
PE3: H1.9 U3.33 | length 25
  Top Layer w0.279: U3.33@51.043,24.094 51.052,24.094 51.96,23.186 57.637,23.186 58.903,21.92 58.903,10.262 H1.9
PF0: H1.8 U3.34 | length 28.1
  Top Layer w0.279: U3.34@51.396,24.448 51.405,24.448 52.21,23.643 57.828,23.643 59.36,22.112 59.36,10.033 56.974,7.647 56.974,5.688 H1.8
PF1: H1.7 U3.35 | length 25.1
  Top Layer w0.279: U3.35@51.75,24.802 51.759,24.802 52.46,24.101 58.018,24.101 59.817,22.301 59.817,8.902 58.191,7.276 H1.7
PF2: H1.6 U3.36 | length 28.1
  Top Layer w0.279: U3.36@52.104,25.155 52.691,24.568 52.714,24.568 52.72,24.562 58.205,24.562 60.274,22.493 60.274,8.712 59.514,7.952 59.514,5.688 H1.6
PF3: H1.5 U3.37 | length 26.2
  Top Layer w0.279: U3.37@52.104,27.171 54.256,25.019 58.395,25.019 60.731,22.682 H1.5
PF4: P1.1 U3.38 | length 36.8
  Top Layer w0.279: U3.38@51.75,27.525 51.759,27.525 52.86,28.626 68.529,28.626 74.117,23.038 v1@74.117,16.51
  Bottom Layer w0.279: v1(74.219,16.51) 75.997,14.732 P1.1
PF5: P1.4 U3.39 | length 40.8
  Top Layer w0.279: U3.39@51.396,27.878 52.601,29.083 68.719,29.083 82.321,15.481 82.321,13.334 P1.4
PF6: C14.1 D5.2 U3.40 | length 49.6
  Top Layer w0.279: U3.40@51.043,28.232 52.351,29.54 68.986,29.54 77.042,21.484 77.563,21.484 78.067,20.98 v1(78.232,20.98) ; D5.2 74.531,10.516 v1(76.048,10.516)
  Top Layer w0.508: C14.1 72.134,11.412 72.744,10.802 D5.2
  Bottom Layer w0.279: v1(76.048,10.516) 75.997,10.566 75.997,11.557 73.457,14.097 73.457,16.826 77.591,20.959 78.211,20.959 v1(78.232,20.98)
PWM: R17.1 U3.10 | length 65.5
  Top Layer w0.279: U3.10@43.017,27.878 43.025,27.878 43.914,26.989 44.715,26.989 v1(44.778,26.926) ; v1(83.947,57.781) 86.072,57.781 R17.1
  Bottom Layer w0.279: v1(44.778,26.926) 44.778,29.224 41.952,32.05 41.952,35.409 64.324,57.781 v1(83.947,57.781) v1@83.845,57.68
RELAY_PIN: R19.1 U3.30 | length 30.7
  Top Layer w0.279: R19.1 34.432,40.719 v1(36.278,40.719) ; v1(46.609,27.915) 46.609,26.407 U3.30@49.982,23.034
  Bottom Layer w0.279: v1@36.271,40.719 36.271,32.385 42.85,25.806 44.829,25.806 45.661,26.638 45.661,26.966 v1(46.609,27.915)
Thermocouple: J7.1 R4.2 R6.2 R13.2 R14.1 | length 37.5
  Top Layer w0.457: R4.2@96.147,45.991 98.315,45.991 v5(98.323,45.999) 98.336,46.012 98.336,47.13 J7.1 ; R14.1 107.29,45.15 106.587,44.448 R6.2 R13.2 108.839,45.781 109.093,46.035 v1(109.093,46.152)
  Bottom Layer w0.457: v5(98.323,45.999) 98.44,45.999 98.796,45.644 108.468,45.644 108.976,46.152 v1(109.093,46.152)
UPDI: P1.5 U3.41 | length 45.5
  Top Layer w0.279: U3.41@50.689,28.585 52.101,29.997 69.176,29.997 76.974,22.2 78.816,22.2 79.959,21.057 v1(79.959,19.101)
  Bottom Layer w0.279: P1.5 79.959,10.973 v1(79.959,19.101)
VIN: C7.1 D2.1 Q1.3 Q4.3 R2.2 R15.2 | length 68.7
  Top Layer w0.508: C7.1 65.208,67.059 65.208,59.667 67.739,57.137 R15.2 ; R2.2 83.1,64.991 83.917,65.808 Q4.3 Q1.3@84.117,70.589
  Top Layer w2.54: D2.1 50.756,70.224 v2(50.902,70.079) ; v2(81.001,72.263) 82.675,70.589 84.117,70.589 Q1.3
  Bottom Layer w2.54: v2(50.902,70.079) 53.54,67.44 76.178,67.44 v2(81.001,72.263)
VIN_detect: D3.1 R15.1 R16.2 U3.22 | length 67.1
  Top Layer w0.279: U3.22@45.491,21.973 45.5,21.973 46.762,23.234 46.959,23.234 47.49,23.765 v1(47.65,23.765) ; D3.1 76.46,53.018 78.696,50.783 78.696,28.696 v1(78.791,28.6)
  Top Layer w0.508: R16.2 73.768,52.742 73.768,53.914 ; R15.1 73.768,53.914 ; D3.1 76.46,53.313 76.383,53.39 76.236,53.39 75.711,53.914 73.768,53.914
  Bottom Layer w0.279: v1(47.65,23.765) 73.956,23.765 v1(78.791,28.6)
pads on no net: RE1.14 U3.3 U3.44 U3.45

## Polygon pours and split planes (outlines as drawn)
GND on Bottom Layer "NONET_L02_P003" (solid, remove dead copper, shelved, pour order 3): 0,0 0,89.306 0.7,90.006 115.006,90.006 115.006,0
GND on Top Layer "NONET_L01_P000" (solid, remove dead copper, shelved, pour order 0): 0,0 115.006,0 115.006,90.006 0,90.006

## Silkscreen, mask and mechanical layers (free items; w line width, h text height)
Mechanical 1:
  the board outline again, w0.013

## Text inside footprints (layer, text, board x,y; h text height)
P1: Top Overlay "6" at 80.808,7.922 h1.02 r270; Top Overlay "5" at 78.108,7.922 h1.02 r270; Top Overlay "2" at 80.808,17.162 h1.02 r270; Top Overlay "1" at 78.108,16.862 h1.02 r270